# Altium PCB SPT3G_LCTestBoard.PcbDoc (part 1 of 3)
Units mil, origin at the board's own origin, x right, y up, seen from the top; angles counter-clockwise.
Board outline 4083.5 x 1969 mil, 6 copper layers (Top Layer, Signal Layer 1, Internal Plane 1, Internal Plane 2, Signal Layer 2, Bottom Layer), stack 61.6 mil thick; 146 components, 265 nets, 634 pads, 264 vias.
Unrouted connection lines stored in the file: 59.
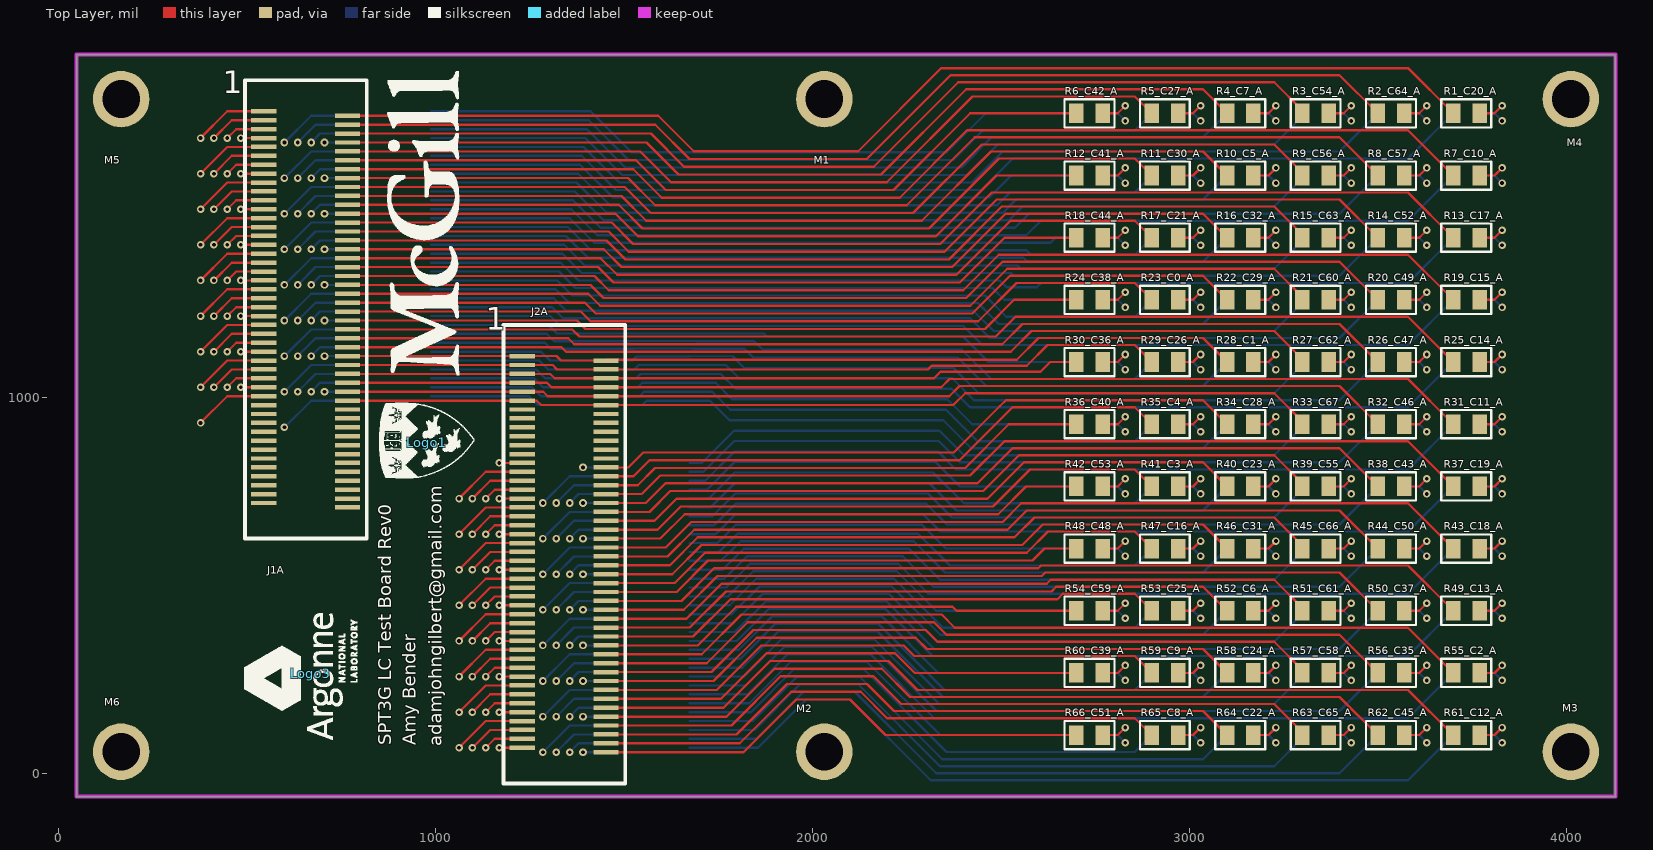
[diagram p0: Top Layer view]
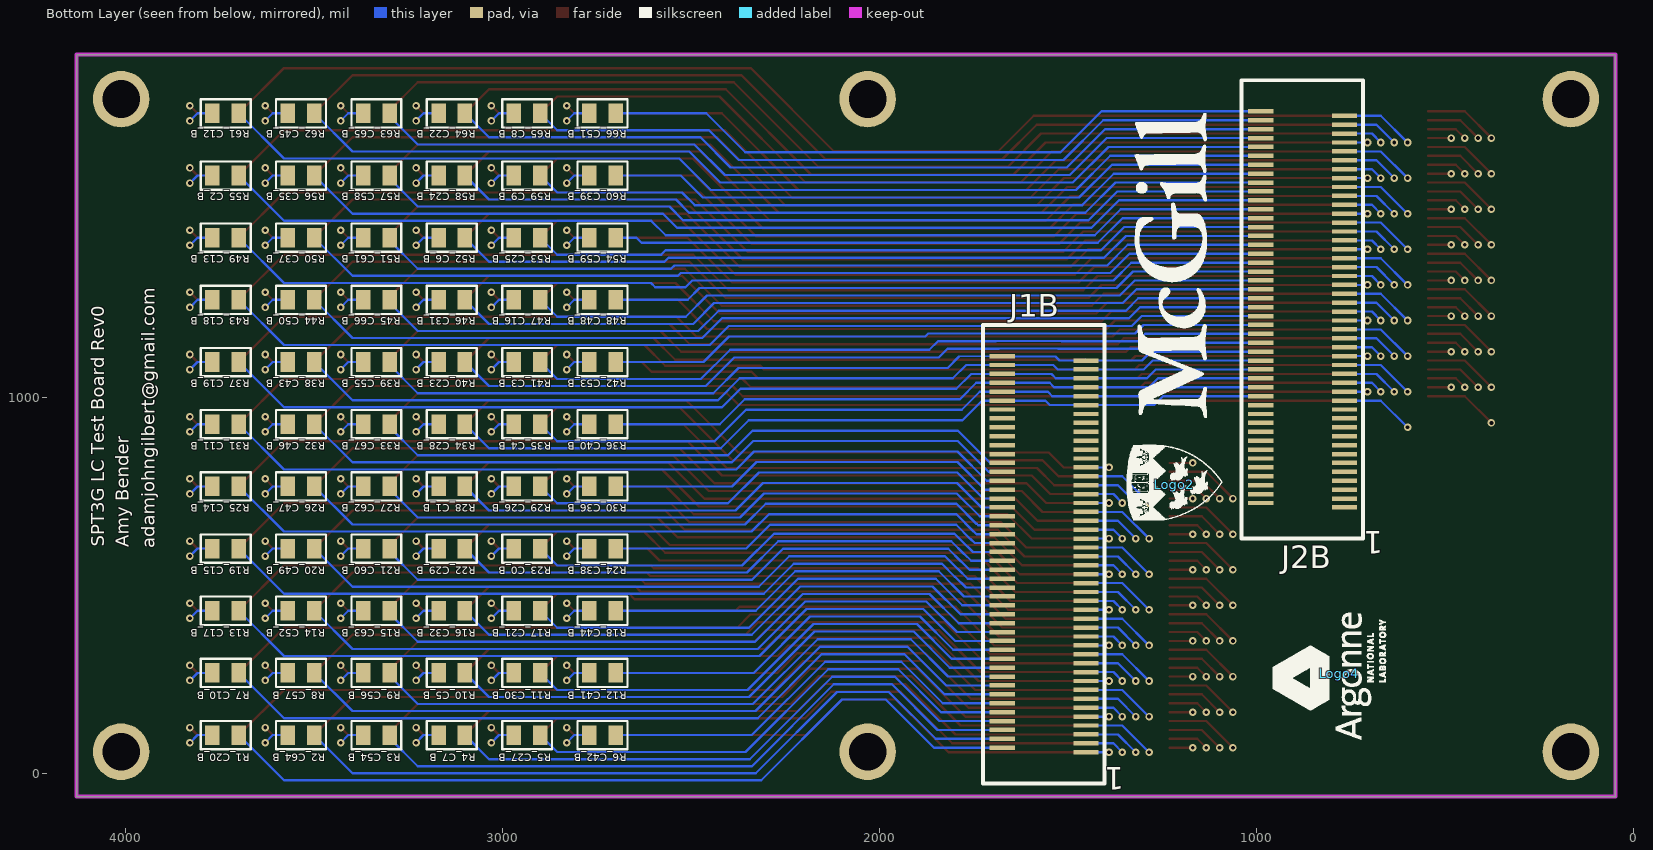
[diagram p1: Bottom Layer view, seen from below]
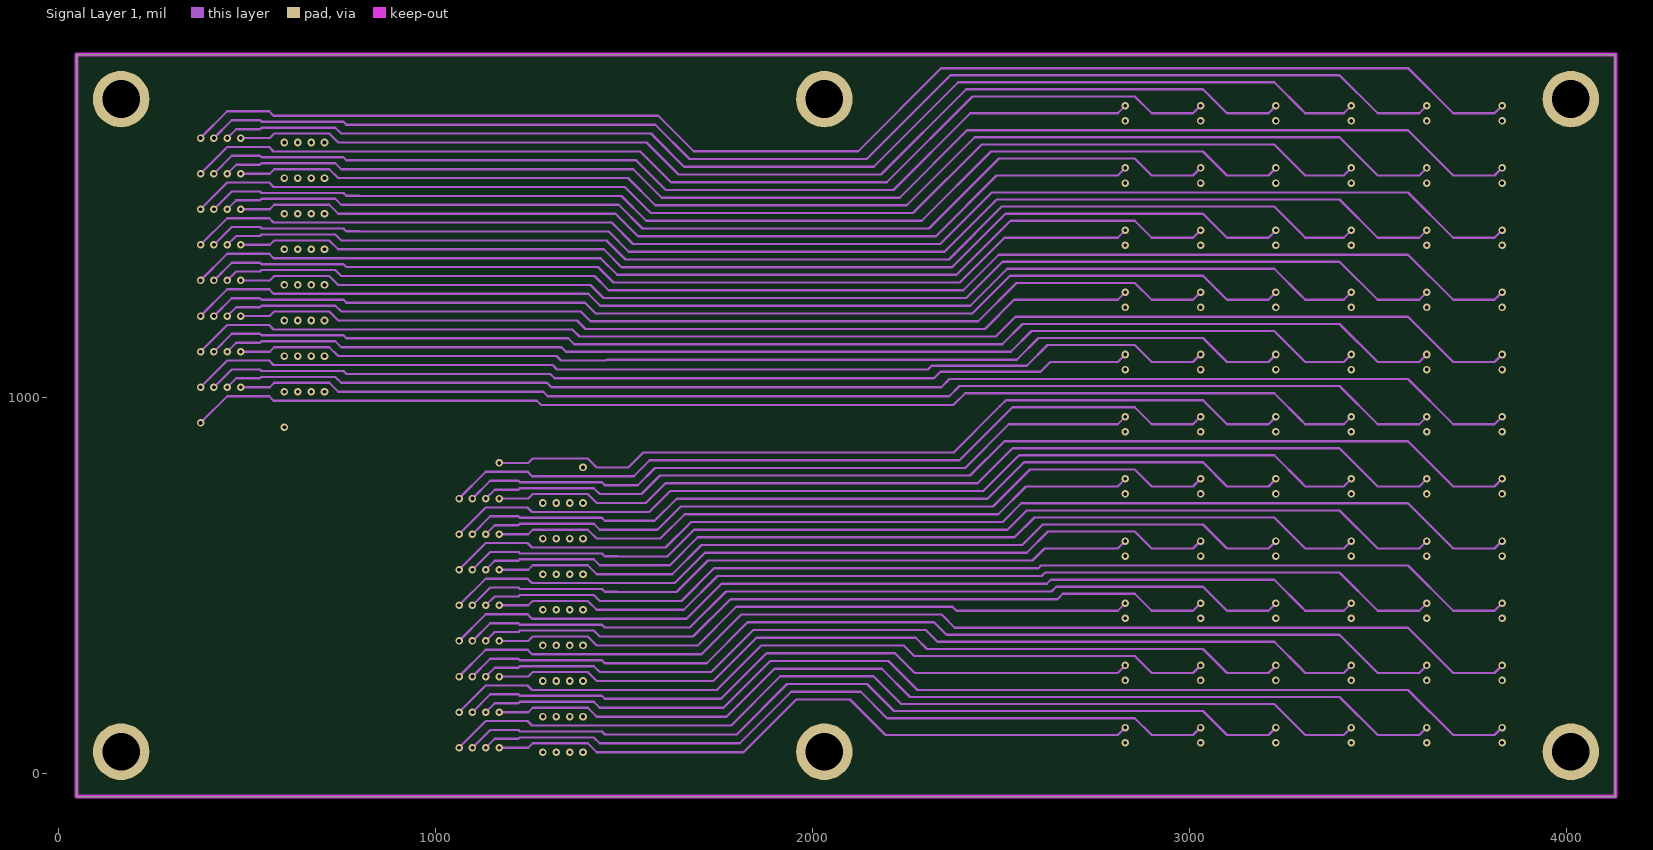
[diagram p2: Signal Layer 1]
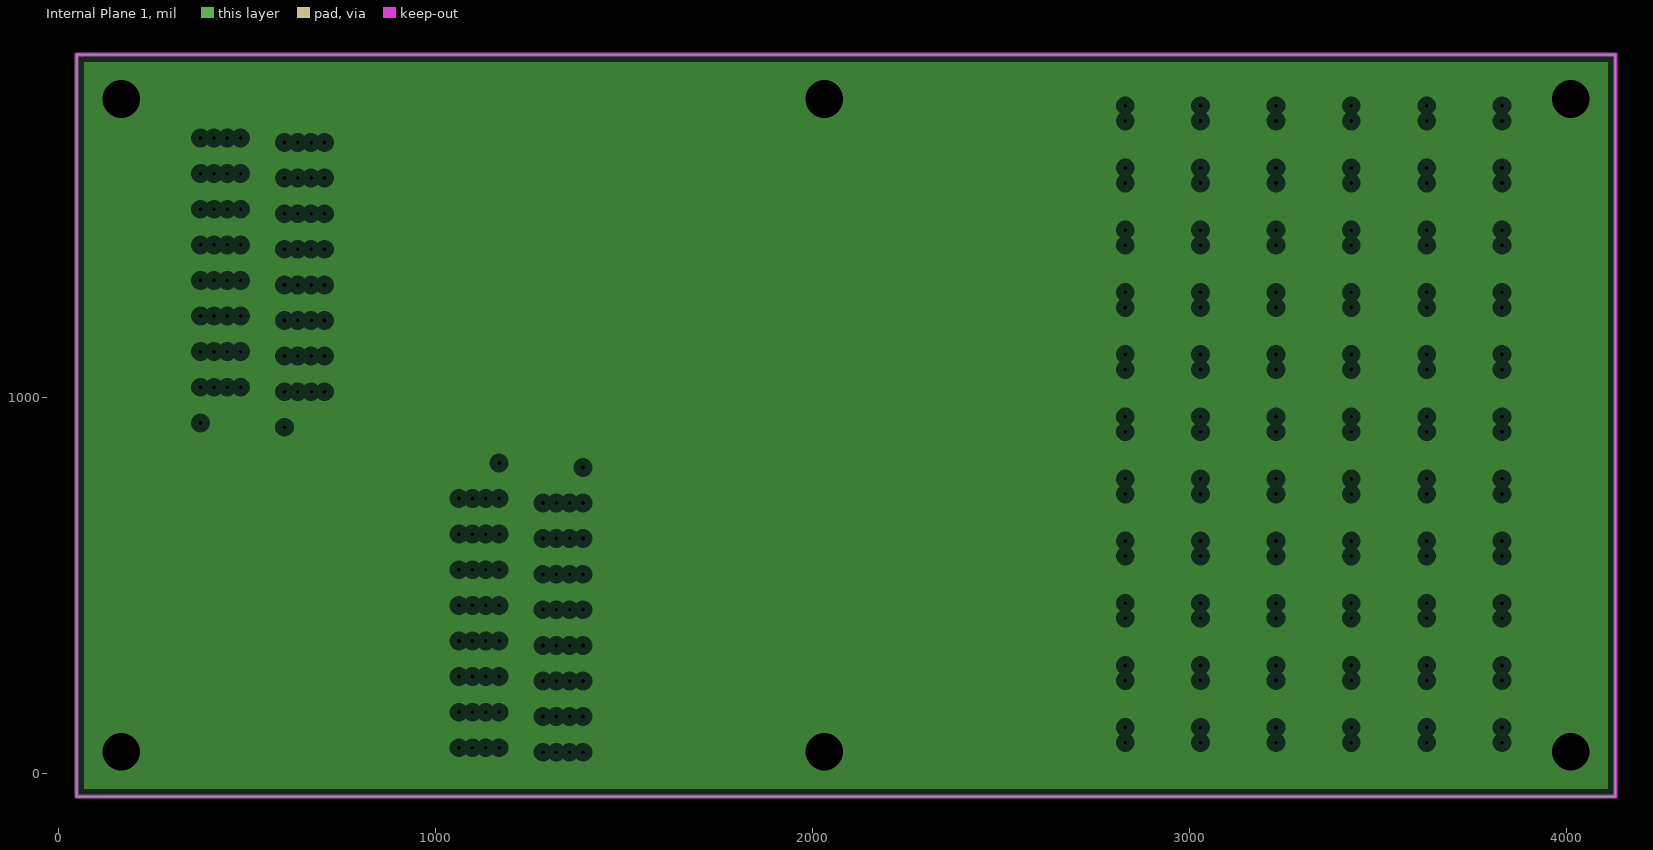
[diagram p3: Internal Plane 1, clearances drawn from the general rule]
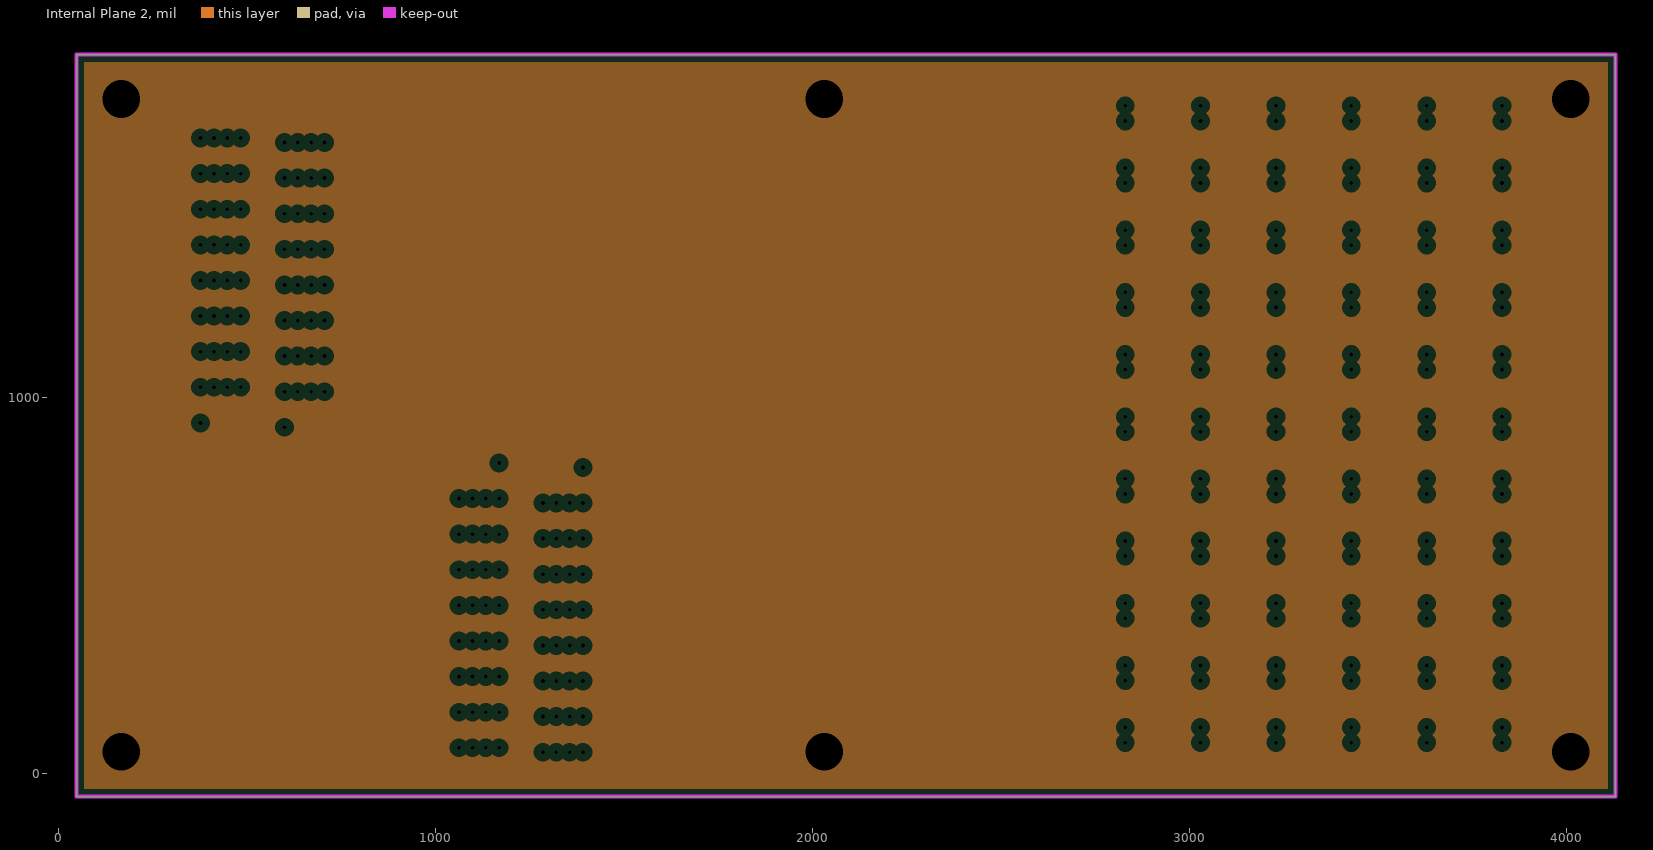
[diagram p4: Internal Plane 2, clearances drawn from the general rule]
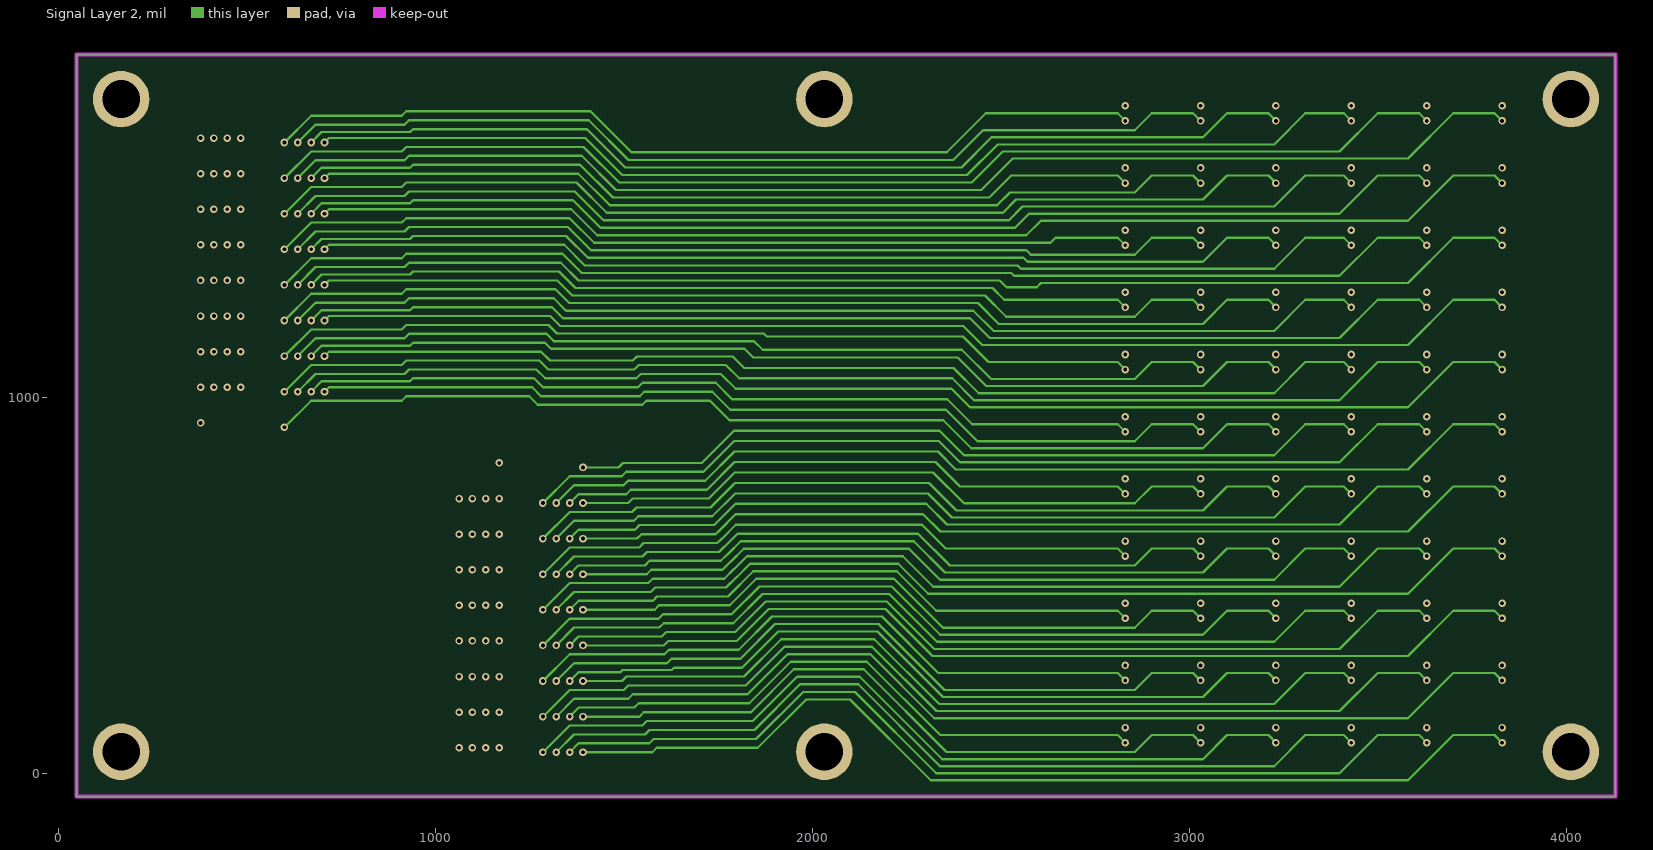
[diagram p5: Signal Layer 2]

## Layer stack, top to bottom
Top Solder: solder mask 0.4, Solder Resist, Dk 3.5
Top Layer: signal copper 1.4
Dielectric 1: core 4, FR-4, Dk 4.2
Signal Layer 1: signal copper 0.7
Dielectric 3: prepreg 9, Dk 4.2
Internal Plane 1: plane copper 0.7, net GND
Dielectric 4: core 30, Dk 4.2
Internal Plane 2: plane copper 0.7, net GND
Dielectric 5: prepreg 9, Dk 4.2
Signal Layer 2: signal copper 0.7
Dielectric 2: core 4, Dk 4.2
Bottom Layer: signal copper 1.4
Bottom Solder: solder mask 0.4, Solder Resist, Dk 3.5

## Board outline
47.08,-60.04 4130.58,-60.04 4130.58,1908.96 47.08,1908.96

## Design rules (kind name [scope] priority, off if disabled: settings)
Clearance [All] p1: gap=6
ComponentClearance [All] p1 off: gap=10 collisioncheckmode=3 verticalgap=10 showdistances=FALSE
HoleSize [All] p1: absolutevalues=TRUE maxlimit=200 minlimit=1 maxpercent=80.000 minpercent=20.000
MinimumSolderMaskSliver [All] p1: minsoldermaskwidth=3
PlaneClearance [All] p1: clearance=20
PlaneConnect MountingHoleRelief [(ObjectKind = 'Pad') And (Layer = 'MultiLayer') And (AsMils(HoleDiameter) = 120)] p1: planeconnectstyle=Direct reliefexpansion=20 reliefentries=4 reliefconductorwidth=30 reliefairgap=10
PlaneConnect [All] p2: planeconnectstyle=Relief reliefexpansion=20 reliefentries=4 reliefconductorwidth=10 reliefairgap=10
PolygonConnect [All] p1: connectstyle=Relief reliefconductorwidth=10 reliefentries=4 polygonreliefangle="90 Angle" airgapwidth=10
RoutingCorners [All] p1: cornerstyle=45-Degree minsetback=100 maxsetback=5000
RoutingLayers [All] p1: top layer_v5=TRUE mid layer 1_v5=TRUE mid layer 2_v5=FALSE bottom layer_v5=FALSE
RoutingPriority [All] p1: routingpriority=1
RoutingVias [All] p1: holewidth=10 width=20 viastyle="Through Hole" minholewidth=10 minwidth=20 maxholewidth=28 maxwidth=50
SilkToBoardRegionClearance [All] p1 off:
SilkToSilkClearance [All] p1: silktosilkclearance=0
SilkToSolderMaskClearance [IsPad] p1: minsilkscreentomaskgap=3 clearancetoexposedcopper=TRUE
SolderMaskExpansion [All] p1: expansion=4
Width [All] p1: maxlimit=100 minlimit=3 preferedwidth=6
19 further rules are at their usual default settings.

## Classes and differential pairs
channel class Resistors: A B
component class TopLevelSchem: Logo1 Logo2 M1 M2 M3 M4 M5 M6
component class S2: J1B J2B
component class S1: J1A J2A
component class B: R0_B R1_C20_B R2_C64_B R3_C54_B R4_C7_B R5_C27_B R6_C42_B R7_C10_B R8_C57_B R9_C56_B R10_C5_B R11_C30_B R12_C41_B R13_C17_B R14_C52_B R15_C63_B R16_C32_B R17_C21_B R18_C44_B R19_C15_B R20_C49_B R21_C60_B R22_C29_B R23_C0_B R24_C38_B R25_C14_B R26_C47_B R27_C62_B R28_C1_B R29_C26_B R30_C36_B R31_C11_B R32_C46_B R33_C67_B R35_C4_B R36_C40_B R37_C19_B R38_C43_B R39_C55_B R40_B R40_C23_B R41_C3_B R42_C53_B R43_C18_B R44_C50_B R45_C66_B R46_C31_B R47_C16_B R48_C48_B R49_C13_B R50_C37_B R51_C61_B R52_C6_B R53_C25_B R54_C59_B R55_C2_B R56_C35_B R57_C58_B R58_C24_B R59_C9_B R60_C39_B R61_C12_B R62_C45_B R63_C65_B R64_C22_B R65_C8_B R66_C51_B
component class A: R0_A R1_C20_A R2_C64_A R3_C54_A R4_C7_A R5_C27_A R6_C42_A R7_C10_A R8_C57_A R9_C56_A R10_C5_A R11_C30_A R12_C41_A R13_C17_A R14_C52_A R15_C63_A R16_C32_A R17_C21_A R18_C44_A R19_C15_A R20_C49_A R21_C60_A R22_C29_A R23_C0_A R24_C38_A R25_C14_A R26_C47_A R27_C62_A R28_C1_A R29_C26_A R30_C36_A R31_C11_A R32_C46_A R33_C67_A R35_C4_A R36_C40_A R37_C19_A R38_C43_A R39_C55_A R40_C23_A R41_C3_A R42_C53_A R43_C18_A R44_C50_A R45_C66_A R46_C31_A R47_C16_A R48_C48_A R49_C13_A R50_C37_A R51_C61_A R52_C6_A R53_C25_A R54_C59_A R55_C2_A R56_C35_A R57_C58_A R58_C24_A R59_C9_A R60_C39_A R61_C12_A R62_C45_A R63_C65_A R64_C22_A R65_C8_A R66_C51_A

## Components (designator, comment, footprint, x,y, rotation, side; value= is the part's Value field where it differs from the comment)
J1A "ZIF Connector" LCBOARD_ZIFCON#1 576.93,1758.47 r270 top
J1B "ZIF Connector" LCBOARD_ZIFCON#2 1485.35,57.68 r90 bottom
J2A "ZIF Connector" LCBOARD_ZIFCON#1 1262.91,1108.86 r270 top
J2B "ZIF Connector" LCBOARD_ZIFCON#2 799.37,707.28 r90 bottom
Logo1 "McGillLogo1" McGillLogo1 975.66,879.43 r90 top
Logo2 "McGillLogo1" McGillLogo1 1217.85,767.88 r90 bottom
Logo3 "ArgonneLogo" ArgonneLogo 668.28,265.72 r90 top
Logo4 "ArgonneLogo" ArgonneLogo 780.12,266.36 r90 bottom (schematic designator Logo3)
M1 "MountingHole" MOUNTINGHOLE#1 2031.36,1790.96 r0 top
M2 "MountingHole" MOUNTINGHOLE#1 2031.36,58.96 r0 top
M3 "MountingHole" MountingHole#1 4220.49,1786.87 r0 top
M4 "MountingHole" MountingHole#2 4012.49,1786.87 r0 top
M5 "MountingHole" MOUNTINGHOLE#2 194.75,1699.77 r0 top
M6 "MountingHole" MOUNTINGHOLE#3 200.56,127.26 r0 top
R1_C20_A "Res0805" 0805 3700,1753.12 r0 top (schematic designator R1_C20)
R1_C20_B "Res0805" 0805 3700,103.12 r0 bottom (schematic designator R1_C20)
R2_C64_A "Res0805" 0805 3500,1753.12 r0 top (schematic designator R2_C64)
R2_C64_B "Res0805" 0805 3500,103.12 r0 bottom (schematic designator R2_C64)
R3_C54_A "Res0805" 0805 3300,1753.12 r0 top (schematic designator R3_C54)
R3_C54_B "Res0805" 0805 3300,103.12 r0 bottom (schematic designator R3_C54)
R4_C7_A "Res0805" 0805 3100,1753.12 r0 top (schematic designator R4_C7)
R4_C7_B "Res0805" 0805 3100,103.12 r0 bottom (schematic designator R4_C7)
R5_C27_A "Res0805" 0805 2900,1753.12 r0 top (schematic designator R5_C27)
R5_C27_B "Res0805" 0805 2900,103.12 r0 bottom (schematic designator R5_C27)
R6_C42_A "Res0805" 0805 2700,1753.12 r0 top (schematic designator R6_C42)
R6_C42_B "Res0805" 0805 2700,103.12 r0 bottom (schematic designator R6_C42)
R7_C10_A "Res0805" 0805 3700,1588.12 r0 top (schematic designator R7_C10)
R7_C10_B "Res0805" 0805 3700,268.12 r0 bottom (schematic designator R7_C10)
R8_C57_A "Res0805" 0805 3500,1588.12 r0 top (schematic designator R8_C57)
R8_C57_B "Res0805" 0805 3500,268.12 r0 bottom (schematic designator R8_C57)
R9_C56_A "Res0805" 0805 3300,1588.12 r0 top (schematic designator R9_C56)
R9_C56_B "Res0805" 0805 3300,268.12 r0 bottom (schematic designator R9_C56)
R10_C5_A "Res0805" 0805 3100,1588.12 r0 top (schematic designator R10_C5)
R10_C5_B "Res0805" 0805 3100,268.12 r0 bottom (schematic designator R10_C5)
R11_C30_A "Res0805" 0805 2900,1588.12 r0 top (schematic designator R11_C30)
R11_C30_B "Res0805" 0805 2900,268.12 r0 bottom (schematic designator R11_C30)
R12_C41_A "Res0805" 0805 2700,1588.12 r0 top (schematic designator R12_C41)
R12_C41_B "Res0805" 0805 2700,268.12 r0 bottom (schematic designator R12_C41)
R13_C17_A "Res0805" 0805 3700,1423.12 r0 top (schematic designator R13_C17)
R13_C17_B "Res0805" 0805 3700,433.12 r0 bottom (schematic designator R13_C17)
R14_C52_A "Res0805" 0805 3500,1423.12 r0 top (schematic designator R14_C52)
R14_C52_B "Res0805" 0805 3500,433.12 r0 bottom (schematic designator R14_C52)
R15_C63_A "Res0805" 0805 3300,1423.12 r0 top (schematic designator R15_C63)
R15_C63_B "Res0805" 0805 3300,433.12 r0 bottom (schematic designator R15_C63)
R16_C32_A "Res0805" 0805 3100,1423.12 r0 top (schematic designator R16_C32)
R16_C32_B "Res0805" 0805 3100,433.12 r0 bottom (schematic designator R16_C32)
R17_C21_A "Res0805" 0805 2900,1423.12 r0 top (schematic designator R17_C21)
R17_C21_B "Res0805" 0805 2900,433.12 r0 bottom (schematic designator R17_C21)
R18_C44_A "Res0805" 0805 2700,1423.12 r0 top (schematic designator R18_C44)
R18_C44_B "Res0805" 0805 2700,433.12 r0 bottom (schematic designator R18_C44)
R19_C15_A "Res0805" 0805 3700,1258.12 r0 top (schematic designator R19_C15)
R19_C15_B "Res0805" 0805 3700,598.12 r0 bottom (schematic designator R19_C15)
R20_C49_A "Res0805" 0805 3500,1258.12 r0 top (schematic designator R20_C49)
R20_C49_B "Res0805" 0805 3500,598.12 r0 bottom (schematic designator R20_C49)
R21_C60_A "Res0805" 0805 3300,1258.12 r0 top (schematic designator R21_C60)
R21_C60_B "Res0805" 0805 3300,598.12 r0 bottom (schematic designator R21_C60)
R22_C29_A "Res0805" 0805 3100,1258.12 r0 top (schematic designator R22_C29)
R22_C29_B "Res0805" 0805 3100,598.12 r0 bottom (schematic designator R22_C29)
R23_C0_A "Res0805" 0805 2900,1258.12 r0 top (schematic designator R23_C0)
R23_C0_B "Res0805" 0805 2900,598.12 r0 bottom (schematic designator R23_C0)
R24_C38_A "Res0805" 0805 2700,1258.12 r0 top (schematic designator R24_C38)
R24_C38_B "Res0805" 0805 2700,598.12 r0 bottom (schematic designator R24_C38)
R25_C14_A "Res0805" 0805 3700,1093.12 r0 top (schematic designator R25_C14)
R25_C14_B "Res0805" 0805 3700,763.12 r0 bottom (schematic designator R25_C14)
R26_C47_A "Res0805" 0805 3500,1093.12 r0 top (schematic designator R26_C47)
R26_C47_B "Res0805" 0805 3500,763.12 r0 bottom (schematic designator R26_C47)
R27_C62_A "Res0805" 0805 3300,1093.12 r0 top (schematic designator R27_C62)
R27_C62_B "Res0805" 0805 3300,763.12 r0 bottom (schematic designator R27_C62)
R28_C1_A "Res0805" 0805 3100,1093.12 r0 top (schematic designator R28_C1)
R28_C1_B "Res0805" 0805 3100,763.12 r0 bottom (schematic designator R28_C1)
R29_C26_A "Res0805" 0805 2900,1093.12 r0 top (schematic designator R29_C26)
R29_C26_B "Res0805" 0805 2900,763.12 r0 bottom (schematic designator R29_C26)
R30_C36_A "Res0805" 0805 2700,1093.12 r0 top (schematic designator R30_C36)
R30_C36_B "Res0805" 0805 2700,763.12 r0 bottom (schematic designator R30_C36)
R31_C11_A "Res0805" 0805 3700,928.12 r0 top (schematic designator R31_C11)
R31_C11_B "Res0805" 0805 3700,928.12 r0 bottom (schematic designator R31_C11)
R32_C46_A "Res0805" 0805 3500,928.12 r0 top (schematic designator R32_C46)
R32_C46_B "Res0805" 0805 3500,928.12 r0 bottom (schematic designator R32_C46)
R33_C67_A "Res0805" 0805 3300,928.12 r0 top (schematic designator R33_C67)
R33_C67_B "Res0805" 0805 3300,928.12 r0 bottom (schematic designator R33_C67)
R34_C28_A "Res0805" 0805 3100,928.12 r0 top (schematic designator R34_C28)
R34_C28_B "Res0805" 0805 3100,928.12 r0 bottom (schematic designator R34_C28)
R35_C4_A "Res0805" 0805 2900,928.12 r0 top (schematic designator R35_C4)
R35_C4_B "Res0805" 0805 2900,928.12 r0 bottom (schematic designator R35_C4)
R36_C40_A "Res0805" 0805 2700,928.12 r0 top (schematic designator R36_C40)
R36_C40_B "Res0805" 0805 2700,928.12 r0 bottom (schematic designator R36_C40)
R37_C19_A "Res0805" 0805 3700,763.12 r0 top (schematic designator R37_C19)
R37_C19_B "Res0805" 0805 3700,1093.12 r0 bottom (schematic designator R37_C19)
R38_C43_A "Res0805" 0805 3500,763.12 r0 top (schematic designator R38_C43)
R38_C43_B "Res0805" 0805 3500,1093.12 r0 bottom (schematic designator R38_C43)
R39_C55_A "Res0805" 0805 3300,763.12 r0 top (schematic designator R39_C55)
R39_C55_B "Res0805" 0805 3300,1093.12 r0 bottom (schematic designator R39_C55)
R40_C23_A "Res0805" 0805 3100,763.12 r0 top (schematic designator R40_C23)
R40_C23_B "Res0805" 0805 3100,1093.12 r0 bottom (schematic designator R40_C23)
R41_C3_A "Res0805" 0805 2900,763.12 r0 top (schematic designator R41_C3)
R41_C3_B "Res0805" 0805 2900,1093.12 r0 bottom (schematic designator R41_C3)
R42_C53_A "Res0805" 0805 2700,763.12 r0 top (schematic designator R42_C53)
R42_C53_B "Res0805" 0805 2700,1093.12 r0 bottom (schematic designator R42_C53)
R43_C18_A "Res0805" 0805 3700,598.12 r0 top (schematic designator R43_C18)
R43_C18_B "Res0805" 0805 3700,1258.12 r0 bottom (schematic designator R43_C18)
R44_C50_A "Res0805" 0805 3500,598.12 r0 top (schematic designator R44_C50)
R44_C50_B "Res0805" 0805 3500,1258.12 r0 bottom (schematic designator R44_C50)
R45_C66_A "Res0805" 0805 3300,598.12 r0 top (schematic designator R45_C66)
R45_C66_B "Res0805" 0805 3300,1258.12 r0 bottom (schematic designator R45_C66)
R46_C31_A "Res0805" 0805 3100,598.12 r0 top (schematic designator R46_C31)
R46_C31_B "Res0805" 0805 3100,1258.12 r0 bottom (schematic designator R46_C31)
R47_C16_A "Res0805" 0805 2900,598.12 r0 top (schematic designator R47_C16)
R47_C16_B "Res0805" 0805 2900,1258.12 r0 bottom (schematic designator R47_C16)
R48_C48_A "Res0805" 0805 2700,598.12 r0 top (schematic designator R48_C48)
R48_C48_B "Res0805" 0805 2700,1258.12 r0 bottom (schematic designator R48_C48)
R49_C13_A "Res0805" 0805 3700,433.12 r0 top (schematic designator R49_C13)
R49_C13_B "Res0805" 0805 3700,1423.12 r0 bottom (schematic designator R49_C13)
R50_C37_A "Res0805" 0805 3500,433.12 r0 top (schematic designator R50_C37)
R50_C37_B "Res0805" 0805 3500,1423.12 r0 bottom (schematic designator R50_C37)
R51_C61_A "Res0805" 0805 3300,433.12 r0 top (schematic designator R51_C61)
R51_C61_B "Res0805" 0805 3300,1423.12 r0 bottom (schematic designator R51_C61)
R52_C6_A "Res0805" 0805 3100,433.12 r0 top (schematic designator R52_C6)
R52_C6_B "Res0805" 0805 3100,1423.12 r0 bottom (schematic designator R52_C6)
R53_C25_A "Res0805" 0805 2900,433.12 r0 top (schematic designator R53_C25)
R53_C25_B "Res0805" 0805 2900,1423.12 r0 bottom (schematic designator R53_C25)
R54_C59_A "Res0805" 0805 2700,433.12 r0 top (schematic designator R54_C59)
R54_C59_B "Res0805" 0805 2700,1423.12 r0 bottom (schematic designator R54_C59)
R55_C2_A "Res0805" 0805 3700,268.12 r0 top (schematic designator R55_C2)
R55_C2_B "Res0805" 0805 3700,1588.12 r0 bottom (schematic designator R55_C2)
R56_C35_A "Res0805" 0805 3500,268.12 r0 top (schematic designator R56_C35)
R56_C35_B "Res0805" 0805 3500,1588.12 r0 bottom (schematic designator R56_C35)
R57_C58_A "Res0805" 0805 3300,268.12 r0 top (schematic designator R57_C58)
R57_C58_B "Res0805" 0805 3300,1588.12 r0 bottom (schematic designator R57_C58)
R58_C24_A "Res0805" 0805 3100,268.12 r0 top (schematic designator R58_C24)
R58_C24_B "Res0805" 0805 3100,1588.12 r0 bottom (schematic designator R58_C24)
R59_C9_A "Res0805" 0805 2900,268.12 r0 top (schematic designator R59_C9)
R59_C9_B "Res0805" 0805 2900,1588.12 r0 bottom (schematic designator R59_C9)
R60_C39_A "Res0805" 0805 2700,268.12 r0 top (schematic designator R60_C39)
R60_C39_B "Res0805" 0805 2700,1588.12 r0 bottom (schematic designator R60_C39)
R61_C12_A "Res0805" 0805 3700,103.12 r0 top (schematic designator R61_C12)
R61_C12_B "Res0805" 0805 3700,1753.12 r0 bottom (schematic designator R61_C12)
R62_C45_A "Res0805" 0805 3500,103.12 r0 top (schematic designator R62_C45)
R62_C45_B "Res0805" 0805 3500,1753.12 r0 bottom (schematic designator R62_C45)
R63_C65_A "Res0805" 0805 3300,103.12 r0 top (schematic designator R63_C65)
R63_C65_B "Res0805" 0805 3300,1753.12 r0 bottom (schematic designator R63_C65)
R64_C22_A "Res0805" 0805 3100,103.12 r0 top (schematic designator R64_C22)
R64_C22_B "Res0805" 0805 3100,1753.12 r0 bottom (schematic designator R64_C22)
R65_C8_A "Res0805" 0805 2900,103.12 r0 top (schematic designator R65_C8)
R65_C8_B "Res0805" 0805 2900,1753.12 r0 bottom (schematic designator R65_C8)
R66_C51_A "Res0805" 0805 2700,103.12 r0 top (schematic designator R66_C51)
R66_C51_B "Res0805" 0805 2700,1753.12 r0 bottom (schematic designator R66_C51)

## Footprints (in the part's own frame and the unit in brackets; to place one, negate y for a bottom-side part, rotate by r counter-clockwise, add the part's x,y. Pads: shape width x height; smd on the part's side, far side on the other; paste and mask are expansions set on the pad)
0805 [mil]
  rect 38.5x52 smd: 1(0,0) 2(70,0)
  silkscreen extent -31,-37 101,38
ArgonneLogo [mil]
  silkscreen extent -175,-125 161,174
LCBOARD_ZIFCON#1 [mm]
  rect 0.3x1.7 smd: 1(0,-0.85) 2(0.3,4.8) 3(0.6,-0.85) 4(0.9,4.8) 5(1.2,-0.85) 6(1.5,4.8) 7(1.8,-0.85) 8(2.1,4.8) 9(2.4,-0.85) 10(2.7,4.8) 11(3,-0.85) 12(3.3,4.8) 13(3.6,-0.85) 14(3.9,4.8) 15(4.2,-0.85) 16(4.5,4.8) 17(4.8,-0.85) 18(5.1,4.8) 19(5.4,-0.85) 20(5.7,4.8) 21(6,-0.85) 22(6.3,4.8) 23(6.6,-0.85) 24(6.9,4.8) 25(7.2,-0.85) 26(7.5,4.8) 27(7.8,-0.85) 28(8.1,4.8) 29(8.4,-0.85) 30(8.7,4.8) 31(9,-0.85) 32(9.3,4.8) 33(9.6,-0.85) 34(9.9,4.8) 35(10.2,-0.85) 36(10.5,4.8) 37(10.8,-0.85) 38(11.1,4.8) 39(11.4,-0.85) 40(11.7,4.8) 41(12,-0.85) 42(12.3,4.8) 43(12.6,-0.85) 44(12.9,4.8) 45(13.2,-0.85) 46(13.5,4.8) 47(13.8,-0.85) 48(14.1,4.8) 49(14.4,-0.85) 50(14.7,4.8) 51(15,-0.85) 52(15.3,4.8) 53(15.6,-0.85) 54(15.9,4.8) 55(16.2,-0.85) 56(16.5,4.8) 57(16.8,-0.85) 58(17.1,4.8) 59(17.4,-0.85) 60(17.7,4.8) 61(18,-0.85) 62(18.3,4.8) 63(18.6,-0.85) 64(18.9,4.8) 65(19.2,-0.85) 66(19.5,4.8) 67(19.8,-0.85) 68(20.1,4.8) 69(20.4,-0.85) 70(20.7,4.8) 71(21,-0.85) 72(21.3,4.8) 73(21.6,-0.85) 74(21.9,4.8) 75(22.2,-0.85) 76(22.5,4.8) 77(22.8,-0.85) 78(23.1,4.8) 79(23.4,-0.85) 80(23.7,4.8) 81(24,-0.85) 82(24.3,4.8) 83(24.6,-0.85) 84(24.9,4.8) 85(25.2,-0.85) 86(25.5,4.8) 87(25.8,-0.85) 88(26.1,4.8) 89(26.4,-0.85) 90(26.7,4.8)
  round 0.5 on Top Overlay: 2(-2.3,-2.4)
  silkscreen extent -2.1,-2.1 28.8,6.1, body extent -2.1,-1.73 28.8,5.68, height 6.5
LCBOARD_ZIFCON#2 [mm]
  rect 0.3x1.7 smd: 1(0,-0.85) 2(0.3,4.8) 3(0.6,-0.85) 4(0.9,4.8) 5(1.2,-0.85) 6(1.5,4.8) 7(1.8,-0.85) 8(2.1,4.8) 9(2.4,-0.85) 10(2.7,4.8) 11(3,-0.85) 12(3.3,4.8) 13(3.6,-0.85) 14(3.9,4.8) 15(4.2,-0.85) 16(4.5,4.8) 17(4.8,-0.85) 18(5.1,4.8) 19(5.4,-0.85) 20(5.7,4.8) 21(6,-0.85) 22(6.3,4.8) 23(6.6,-0.85) 24(6.9,4.8) 25(7.2,-0.85) 26(7.5,4.8) 27(7.8,-0.85) 28(8.1,4.8) 29(8.4,-0.85) 30(8.7,4.8) 31(9,-0.85) 32(9.3,4.8) 33(9.6,-0.85) 34(9.9,4.8) 35(10.2,-0.85) 36(10.5,4.8) 37(10.8,-0.85) 38(11.1,4.8) 39(11.4,-0.85) 40(11.7,4.8) 41(12,-0.85) 42(12.3,4.8) 43(12.6,-0.85) 44(12.9,4.8) 45(13.2,-0.85) 46(13.5,4.8) 47(13.8,-0.85) 48(14.1,4.8) 49(14.4,-0.85) 50(14.7,4.8) 51(15,-0.85) 52(15.3,4.8) 53(15.6,-0.85) 54(15.9,4.8) 55(16.2,-0.85) 56(16.5,4.8) 57(16.8,-0.85) 58(17.1,4.8) 59(17.4,-0.85) 60(17.7,4.8) 61(18,-0.85) 62(18.3,4.8) 63(18.6,-0.85) 64(18.9,4.8) 65(19.2,-0.85) 66(19.5,4.8) 67(19.8,-0.85) 68(20.1,4.8) 69(20.4,-0.85) 70(20.7,4.8) 71(21,-0.85) 72(21.3,4.8) 73(21.6,-0.85) 74(21.9,4.8) 75(22.2,-0.85) 76(22.5,4.8) 77(22.8,-0.85) 78(23.1,4.8) 79(23.4,-0.85) 80(23.7,4.8) 81(24,-0.85) 82(24.3,4.8) 83(24.6,-0.85) 84(24.9,4.8) 85(25.2,-0.85) 86(25.5,4.8) 87(25.8,-0.85) 88(26.1,4.8) 89(26.4,-0.85) 90(26.7,4.8)
  round 0.5 on Bottom Overlay: 2(-2.3,-2.4)
  silkscreen extent -2.1,-2.1 28.8,6.1, body extent -2.1,-1.73 28.8,5.68, height 6.5
McGillLogo1 [mil] "McGillLogo"
  silkscreen extent -95,-127 986,124
MOUNTINGHOLE#1 [mil] "Mounting Hole"
  round 150 hole 100: 0(0,0)
MOUNTINGHOLE#2 [mil] "Mounting Hole"
  round 150 hole 100: 0(-29.55,91.18)
MOUNTINGHOLE#3 [mil] "Mounting Hole"
  round 150 hole 100: 0(-35.37,-68.28)
MountingHole#1 [mil] "Mounting Hole"
  round 150 hole 100: 0(-208,-1727.91)
MountingHole#2 [mil] "Mounting Hole"
  round 150 hole 100: 0(0,4.09)

## Part data
J1A J1B J2A J2B: library part LCboard_FH16-90S-0.3SHW(05)
Logo1 Logo2 Logo3 Logo4: library part Logo
R1_C20_A R1_C20_B R2_C64_A R2_C64_B R3_C54_A R3_C54_B R4_C7_A R4_C7_B R5_C27_A R5_C27_B R6_C42_A R6_C42_B R7_C10_A R7_C10_B R8_C57_A R8_C57_B R9_C56_A R9_C56_B R10_C5_A R10_C5_B R11_C30_A R11_C30_B R12_C41_A R12_C41_B R13_C17_A R13_C17_B R14_C52_A R14_C52_B R15_C63_A R15_C63_B R16_C32_A R16_C32_B R17_C21_A R17_C21_B R18_C44_A R18_C44_B R19_C15_A R19_C15_B R20_C49_A R20_C49_B R21_C60_A R21_C60_B R22_C29_A R22_C29_B R23_C0_A R23_C0_B R24_C38_A R24_C38_B R25_C14_A R25_C14_B R26_C47_A R26_C47_B R27_C62_A R27_C62_B R28_C1_A R28_C1_B R29_C26_A R29_C26_B R30_C36_A R30_C36_B R31_C11_A R31_C11_B R32_C46_A R32_C46_B R33_C67_A R33_C67_B R34_C28_A R34_C28_B R35_C4_A R35_C4_B R36_C40_A R36_C40_B R37_C19_A R37_C19_B R38_C43_A R38_C43_B R39_C55_A R39_C55_B R40_C23_A R40_C23_B R41_C3_A R41_C3_B R42_C53_A R42_C53_B R43_C18_A R43_C18_B R44_C50_A R44_C50_B R45_C66_A R45_C66_B R46_C31_A R46_C31_B R47_C16_A R47_C16_B R48_C48_A R48_C48_B R49_C13_A R49_C13_B R50_C37_A R50_C37_B R51_C61_A R51_C61_B R52_C6_A R52_C6_B R53_C25_A R53_C25_B R54_C59_A R54_C59_B R55_C2_A R55_C2_B R56_C35_A R56_C35_B R57_C58_A R57_C58_B R58_C24_A R58_C24_B R59_C9_A R59_C9_B R60_C39_A R60_C39_B R61_C12_A R61_C12_B R62_C45_A R62_C45_B R63_C65_A R63_C65_B R64_C22_A R64_C22_B R65_C8_A R65_C8_B R66_C51_A R66_C51_B: "Resistor"

## Via types
v1: diameter 20, hole 10, Top Layer to Bottom Layer, 264 vias

## Nets (pads, with @x,y where several pads share a name; then routed paths per layer and width w, separated by ;. In a path a pad name is that pad's centre, name@x,y a point inside that pad or via, vN(x,y) a via of type N, cw(c..) or ccw(c..) an arc to the next point about the centre after c; other vN are vias at no path point)
FREQA0: J1A.46 R23_C0_A.1 | length 2205.3
  Top Layer w6: J1A.46@765.9,1226.97 1385.14,1226.97 1410.53,1201.58 2439.65,1201.58 2541.2,1303.13 2855,1303.13 R23_C0_A.1@2900,1258.13
FREQA1: J1A.56 J2A.1 J2A.2@1451.89,1097.05 R28_C1_A.1 | length 2390.2
  Top Layer w6: J1A.56@765.9,1108.86 J2A.1@1229.45,1108.86 1320.79,1108.86 1332.6,1097.05 J2A.2@1451.89,1097.05 1453.97,1099.13 1797.52,1099.13 2286.86,1099.13 2541.94,1099.13 2599.69,1156.88 3036.25,1156.88 R28_C1_A.1@3100,1093.13
FREQA2: J2A.68 R55_C2_A.1 | length 2355.9
  Top Layer w6: J2A.68@1451.89,317.52 1705.87,317.52 1811.3,422.95 2342.86,422.95 2377.69,388.13 3580,388.13 R55_C2_A.1@3700,268.13
FREQA3: J2A.40 R41_C3_A.1 | length 1533
  Top Layer w6: J2A.40@1451.89,648.23 1588.87,648.23 1650.45,709.81 2478.99,709.81 2577.3,808.13 2855,808.13 R41_C3_A.1@2900,763.13
FREQA4: J2A.28 R35_C4_A.1 | length 1542.6
  Top Layer w6: J2A.28@1451.89,789.96 1524.83,789.96 1567.62,832.76 1763.65,832.76 2390.23,832.76 2510.31,952.84 2530.6,973.13 2855,973.13 R35_C4_A.1@2900,928.13
FREQA5: J1A.20 R10_C5_A.1 | length 2464.1
  Top Layer w6: J1A.20@765.9,1534.06 1492.84,1534.06 1558.95,1467.95 2289.85,1467.95 2473.78,1651.88 3036.25,1651.88 R10_C5_A.1@3100,1588.13
FREQA6: J2A.62 R52_C6_A.1 | length 1719.5
  Top Layer w6: J2A.62@1451.89,388.39 1674.25,388.39 1770.29,484.42 2600.23,484.42 2634.24,484.42 2646.69,496.88 3036.25,496.88 R52_C6_A.1@3100,433.13
FREQA7: J1A.8 R4_C7_A.1 | length 2489.3
  Top Layer w6: J1A.8@765.9,1675.79 1559.26,1675.79 1644.16,1590.89 2181.85,1590.89 2407.84,1816.88 3036.25,1816.88 R4_C7_A.1@3100,1753.13
FREQA8: J2A.88 R65_C8_A.1 | length 1552.4
  Top Layer w6: J2A.88@1451.89,81.3 1806.83,81.3 1943.58,218.05 2127.8,218.05 2197.73,148.13 2855,148.13 R65_C8_A.1@2900,103.13
FREQA9: J2A.76 R59_C9_A.1 | length 1527.2
  Top Layer w6: J2A.76@1451.89,223.03 1746.06,223.03 1864.02,340.99 2242.35,340.99 2270.22,313.13 2575.78,313.13 2855,313.13 R59_C9_A.1@2900,268.13
FREQA10: J1A.14 R7_C10_A.1 | length 3089.1
  Top Layer w6: J1A.14@765.9,1604.92 1524.07,1604.92 1599.57,1529.42 2231.32,1529.42 2410.03,1708.13 3580,1708.13 R7_C10_A.1@3700,1588.13
FREQA11: J1A.62 J2A.7 J2A.8 R31_C11_A.1 | length 2997.8
  Top Layer w6: J1A.62@765.9,1037.99 J2A.7@1229.45,1037.99 1295.44,1037.99 1307.25,1026.18 J2A.8@1451.89,1026.18 1734.14,1026.18 2341.76,1026.18 2363.7,1048.13 3580,1048.13 R31_C11_A.1@3700,928.13
FREQA12: J2A.80 R61_C12_A.1 | length 2381.1
  Top Layer w6: J2A.80@1451.89,175.79 1763.76,175.79 1887.98,300.01 2201.54,300.01 2278.42,223.13 3580,223.13 R61_C12_A.1@3700,103.13
FREQA13: J2A.56 R49_C13_A.1 | length 2336.7
  Top Layer w6: J2A.56@1451.89,459.25 1652.12,459.25 1738.76,545.89 2598.77,545.89 2606,553.13 3580,553.13 R49_C13_A.1@3700,433.13
FREQA14: J1A.50 R25_C14_A.1 | length 3013.2
  Top Layer w6: J1A.50@765.9,1179.73 1362.61,1179.73 1381.45,1160.88 2486.5,1160.88 2538.74,1213.13 3580,1213.13 R25_C14_A.1@3700,1093.13
FREQA15: J1A.38 R19_C15_A.1 | length 3038.7
  Top Layer w6: J1A.38@765.9,1321.46 1421.27,1321.46 1459.19,1283.54 2399.69,1283.54 2494.27,1378.13 3580,1378.13 R19_C15_A.1@3700,1258.13
FREQA16: J2A.52 R47_C16_A.1 | length 1523.3
  Top Layer w6: J2A.52@1451.89,506.5 1634.37,506.5 1714.74,586.87 2568.37,586.87 2624.62,643.13 2855,643.13 R47_C16_A.1@2900,598.13
FREQA17: J1A.26 R13_C17_A.1 | length 3063.9
  Top Layer w6: J1A.26@765.9,1463.19 1466.92,1463.19 1523.63,1406.48 2338.88,1406.48 2475.52,1543.13 3580,1543.13 R13_C17_A.1@3700,1423.13
FREQA18: J2A.44 R43_C18_A.1 | length 2346.3
  Top Layer w6: J2A.44@1451.89,600.99 1610.33,600.99 1678.18,668.83 2504.71,668.83 2554,718.13 3580,718.13 R43_C18_A.1@3700,598.13
FREQA19: J2A.32 R37_C19_A.1 | length 2356
  Top Layer w6: J2A.32@1451.89,742.72 1546.72,742.72 1595.78,791.77 1803.62,791.77 2417.79,791.77 2509.14,883.13 3580,883.13 R37_C19_A.1@3700,763.13
FREQA20: J1A.2@765.9,1746.65 R1_C20_A.1 | length 3114.3
  Top Layer w6: J1A.2@765.9,1746.65 1590.54,1746.65 1684.84,1652.36 2121.13,1652.36 2341.89,1873.13 3580,1873.13 R1_C20_A.1@3700,1753.13
FREQA21: J1A.34 R17_C21_A.1 | length 2230.5
  Top Layer w6: J1A.34@765.9,1368.7 1437.66,1368.7 1481.84,1324.52 2381.91,1324.52 2525.51,1468.13 2855,1468.13 R17_C21_A.1@2900,1423.13
FREQA22: J2A.86 R64_C22_A.1 | length 1759.6
  Top Layer w6: J2A.86@1451.89,104.92 1798.52,104.92 1932.14,238.54 2144.81,238.54 2216.48,166.88 3036.25,166.88 R64_C22_A.1@3100,103.13
FREQA23: J2A.38 R40_C23_A.1 | length 1738.7
  Top Layer w6: J2A.38@1451.89,671.85 1580.74,671.85 1639.2,730.3 1865.41,730.3 2464.46,730.3 2561.03,826.88 3036.25,826.88 R40_C23_A.1@3100,763.13
FREQA24: J2A.74 R58_C24_A.1 | length 1734.3
  Top Layer w6: J2A.74@1451.89,246.66 1737,246.66 1851.83,361.48 2274.17,361.48 2303.78,331.88 3036.25,331.88 R58_C24_A.1@3100,268.13
FREQA25: J2A.64 R53_C25_A.1 | length 1513.7
  Top Layer w6: J2A.64@1451.89,364.77 1683.11,364.77 1782.28,463.93 2650.04,463.93 2664.23,478.13 2855,478.13 R53_C25_A.1@2900,433.13
FREQA26: J1A.58 J2A.3 J2A.4 R29_C26_A.1 | length 2184.4
  Top Layer w6: J1A.58@765.9,1085.24 J2A.3@1229.45,1085.24 1310.41,1085.24 1322.22,1073.43 J2A.4@1451.89,1073.43 1772.58,1073.43 2306.22,1073.43 2315.92,1083.13 2568.31,1083.13 2623.31,1138.13 2855,1138.13 R29_C26_A.1@2900,1093.13
FREQA27: J1A.10 R5_C27_A.1 | length 2280.9
  Top Layer w6: J1A.10@765.9,1652.17 1542.69,1652.17 1624.46,1570.4 2196.96,1570.4 2424.69,1798.13 2855,1798.13 R5_C27_A.1@2900,1753.13
FREQA28: J2A.26 R34_C28_A.1 | length 1748.4
  Top Layer w6: J2A.26@1451.89,813.58 1511.11,813.58 1550.77,853.25 1745.01,853.25 2374.81,853.25 2497.1,975.54 2513.44,991.88 3036.25,991.88 R34_C28_A.1@3100,928.13
FREQA29: J1A.44 R22_C29_A.1 | length 2413.7
  Top Layer w6: J1A.44@765.9,1250.59 1396.12,1250.59 1424.65,1222.07 2424.15,1222.07 2523.96,1321.88 3036.25,1321.88 R22_C29_A.1@3100,1258.13
FREQA30: J1A.22 R11_C30_A.1 | length 2255.7
  Top Layer w6: J1A.22@765.9,1510.43 1485.99,1510.43 1548.96,1447.46 2309.38,1447.46 2495.05,1633.13 2855,1633.13 R11_C30_A.1@2900,1588.13
FREQA31: J2A.50 R46_C31_A.1 | length 1729.1
  Top Layer w6: J2A.50@1451.89,530.12 1627.99,530.12 1705.23,607.36 2556.49,607.36 2611,661.88 3036.25,661.88 R46_C31_A.1@3100,598.13
FREQA32: J1A.32 R16_C32_A.1 | length 2438.8
  Top Layer w6: J1A.32@765.9,1392.32 1445.8,1392.32 1493.05,1345.08 2370.47,1345.08 2512.26,1486.88 3036.25,1486.88 R16_C32_A.1@3100,1423.13
FREQA35: J2A.70 R56_C35_A.1 | length 2148.7
  Top Layer w6: J2A.70@1451.89,293.9 1719.25,293.9 1827.81,402.46 2322.59,402.46 2355.68,369.38 3398.75,369.38 R56_C35_A.1@3500,268.13
FREQA36: J1A.60 J2A.5 J2A.6 R30_C36_A.1 | length 1957
  Top Layer w6: J1A.60@765.9,1061.62 J2A.5@1229.45,1061.62 1304.19,1061.62 1316,1049.8 J2A.6@1451.89,1049.8 1756.41,1049.8 2322.11,1049.8 2339.44,1067.13 2605.02,1067.13 2630.86,1092.96 2700,1092.96 R30_C36_A.1@2700,1093.13
FREQA37: J2A.58 R50_C37_A.1 | length 2131
  Top Layer w6: J2A.58@1451.89,435.63 1657.98,435.63 1747.75,525.4 2569.09,525.4 2608.54,525.4 2617.51,534.38 3398.75,534.38 R50_C37_A.1@3500,433.13
FREQA38: J1A.48 R24_C38_A.1 | length 1975.2
  Top Layer w6: J1A.48@765.9,1203.35 1375.16,1203.35 1397.42,1181.09 2457.7,1181.09 2534.74,1258.13 R24_C38_A.1@2700,1258.13
FREQA39: J2A.78 R60_C39_A.1 | length 1320
  Top Layer w6: J2A.78@1451.89,199.41 1757.04,199.41 1878.13,320.5 2219.09,320.5 2271.47,268.13 R60_C39_A.1@2700,268.13
FREQA40: J2A.30 R36_C40_A.1 | length 1315.1
  Top Layer w6: J2A.30@1451.89,766.34 1535.96,766.34 1581.88,812.26 1785.74,812.26 2405.1,812.26 2520.96,928.13 R36_C40_A.1@2700,928.13
FREQA41: J1A.24 R12_C41_A.1 | length 2025.6
  Top Layer w6: J1A.24@765.9,1486.81 1477.08,1486.81 1536.93,1426.97 2327.37,1426.97 2488.52,1588.13 R12_C41_A.1@2700,1588.13
FREQA42: J1A.12 R6_C42_A.1 | length 2050.8
  Top Layer w6: J1A.12@765.9,1628.54 1531.71,1628.54 1610.34,1549.91 2215.13,1549.91 2418.35,1753.13 R6_C42_A.1@2700,1753.13
FREQA43: J2A.34 R38_C43_A.1 | length 2150.2
  Top Layer w6: J2A.34@1451.89,719.1 1557.49,719.1 1609.68,771.28 1817.37,771.28 2437.85,771.28 2530.94,864.38 3398.75,864.38 R38_C43_A.1@3500,763.13
FREQA44: J1A.36 R18_C44_A.1 | length 2000.4
  Top Layer w6: J1A.36@765.9,1345.08 1430.58,1345.08 1471.63,1304.03 2390.68,1304.03 2509.77,1423.13 R18_C44_A.1@2700,1423.13
FREQA45: J2A.82 R62_C45_A.1 | length 2173.9
  Top Layer w6: J2A.82@1451.89,152.17 1771.83,152.17 1899.18,279.52 2183.61,279.52 2258.76,204.38 3398.75,204.38 R62_C45_A.1@3500,103.13
FREQA46: J1A.64 J2A.9 J2A.10 R32_C46_A.1 | length 2792
  Top Layer w6: J1A.64@765.9,1014.37 J2A.9@1229.45,1014.37 1285.32,1014.37 1297.13,1002.56 1452.53,1002.56 1711.34,1002.56 2363.01,1002.56 2389.83,1029.38 3398.75,1029.38 R32_C46_A.1@3500,928.13
FREQA47: J1A.52 R26_C47_A.1 | length 2805.2
  Top Layer w6: J1A.52@765.9,1156.1 1351.62,1156.1 1367.64,1140.09 1859.11,1140.09 2219.31,1140.09 2503.21,1140.09 2557.49,1194.38 3398.75,1194.38 R26_C47_A.1@3500,1093.13
FREQA48: J2A.54 R48_C48_A.1 | length 1295.9
  Top Layer w6: J2A.54@1451.89,482.88 1639.36,482.88 1722.87,566.38 1980,566.38 2583.99,566.38 2615.73,598.13 R48_C48_A.1@2700,598.13
FREQA49: J1A.40 R20_C49_A.1 | length 2830.3
  Top Layer w6: J1A.40@765.9,1297.84 1410.6,1297.84 1445.39,1263.05 2407.88,1263.05 2504.2,1359.38 3398.75,1359.38 R20_C49_A.1@3500,1258.13
FREQA50: J2A.46 R44_C50_A.1 | length 2140.6
  Top Layer w6: J2A.46@1451.89,577.36 1615.23,577.36 1686.21,648.34 2517.73,648.34 2568.76,699.38 3398.75,699.38 R44_C50_A.1@3500,598.13
FREQA51: J2A.90 R66_C51_A.1 | length 1345.2
  Top Layer w6: J2A.90@1451.89,57.68 1816.75,57.68 1956.64,197.56 2099.28,197.56 2193.72,103.13 R66_C51_A.1@2700,103.13
FREQA52: J1A.28 R14_C52_A.1 | length 2855.6
  Top Layer w6: J1A.28@765.9,1439.57 1458.94,1439.57 1512.52,1385.99 2350.39,1385.99 2488.77,1524.38 3398.75,1524.38 R14_C52_A.1@3500,1423.13
FREQA53: J2A.42 R42_C53_A.1 | length 1305.5
  Top Layer w6: J2A.42@1451.89,624.61 1596.21,624.61 1660.92,689.32 2492.91,689.32 2566.71,763.13 R42_C53_A.1@2700,763.13
FREQA54: J1A.6 R3_C54_A.1 | length 2702
  Top Layer w6: J1A.6@765.9,1699.41 1571.17,1699.41 1659.2,1611.38 2162.33,1611.38 2386.57,1835.63 3225,1835.63 3300,1760.63 R3_C54_A.1@3300,1753.13
FREQA55: J2A.36 R39_C55_A.1 | length 1948.9
  Top Layer w6: J2A.36@1451.89,695.47 1567.14,695.47 1622.46,750.79 1843.49,750.79 2453.03,750.79 2547.87,845.63 3225,845.63 3300,770.63 R39_C55_A.1@3300,763.13
FREQA56: J1A.18 R9_C56_A.1 | length 2676.8
  Top Layer w6: J1A.18@765.9,1557.68 1501.77,1557.68 1571.01,1488.44 2266.89,1488.44 2449.07,1670.63 3225,1670.63 3300,1595.63 R9_C56_A.1@3300,1588.13
FREQA57: J1A.16 R8_C57_A.1 | length 2880.8
  Top Layer w6: J1A.16@765.9,1581.3 1510.29,1581.3 1582.67,1508.93 2250.01,1508.93 2430.46,1689.38 3398.75,1689.38 R8_C57_A.1@3500,1588.13
FREQA58: J2A.72 R57_C58_A.1 | length 1945.9
  Top Layer w6: J2A.72@1451.89,270.28 1731.62,270.28 1843.32,381.97 2300.28,381.97 2331.63,350.63 3225,350.63 3300,275.63 R57_C58_A.1@3300,268.13
FREQA59: J2A.66 R54_C59_A.1 | length 1295
  Top Layer w6: J2A.66@1451.89,341.14 1695.49,341.14 1797.79,443.44 2371.42,443.44 2381.91,432.96 2700,432.96 R54_C59_A.1@2700,433.13
FREQA60: J1A.42 R21_C60_A.1 | length 2626.4
  Top Layer w6: J1A.42@765.9,1274.21 1404.88,1274.21 1436.53,1242.56 2418.69,1242.56 2516.76,1340.63 3225,1340.63 3300,1265.63 R21_C60_A.1@3300,1258.13
FREQA61: J2A.60 R51_C61_A.1 | length 1929.6
  Top Layer w6: J2A.60@1451.89,412.01 1665.77,412.01 1758.67,504.91 2586.98,504.91 2621.39,504.91 2632.1,515.63 3225,515.63 3300,440.63 R51_C61_A.1@3300,433.13
FREQA62: J1A.54 R27_C62_A.1 | length 2600.3
  Top Layer w6: J1A.54@765.9,1132.48 1334.12,1132.48 1345.93,1120.67 1829.53,1120.67 2258.55,1120.67 2525.98,1120.67 2580.94,1175.63 3225,1175.63 3300,1100.63 R27_C62_A.1@3300,1093.13
FREQA63: J1A.30 R15_C63_A.1 | length 2651.6
  Top Layer w6: J1A.30@765.9,1415.95 1453.56,1415.95 1504.01,1365.5 2361.9,1365.5 2502.02,1505.63 3225,1505.63 3300,1430.63 R15_C63_A.1@3300,1423.13
FREQA64: J1A.4 R2_C64_A.1 | length 2906
  Top Layer w6: J1A.4@765.9,1723.03 1582.35,1723.03 1673.51,1631.87 2143.77,1631.87 2366.28,1854.38 3398.75,1854.38 R2_C64_A.1@3500,1753.13
FREQA65: J2A.84 R63_C65_A.1 | length 1971.1
  Top Layer w6: J2A.84@1451.89,128.54 1784.72,128.54 1915.21,259.03 2161.82,259.03 2235.23,185.63 3225,185.63 3300,110.63 R63_C65_A.1@3300,103.13
FREQA66: J2A.48 R45_C66_A.1 | length 1939.2
  Top Layer w6: J2A.48@1451.89,553.74 1621.61,553.74 1695.72,627.85 2536,627.85 2588.77,680.63 3225,680.63 3300,605.63 R45_C66_A.1@3300,598.13
FREQA67: J1A.66 J2A.11 J2A.12 R33_C67_A.1 | length 2590.7
  Top Layer w6: J1A.66@765.9,990.75 J2A.11@1229.45,990.75 1268.3,990.75 1280.11,978.94 J2A.12@1451.89,978.94 2373.37,978.94 2405.06,1010.63 3225,1010.63 3300,935.63 R33_C67_A.1@3300,928.13
FREQB0: J1B.46 R23_C0_B.1 | length 1547.6
  Bottom Layer w6: J1B.46@1674.33,589.17 1751.99,589.17 ; R23_C0_B.1@2900,598.13 2855,553.13 2645,553.13 2364.55,553.13 2279.9,637.77 1980,637.77 ; 1751.99,589.17 1766.48,603.66 ; 1751.99,589.17 1766.48,603.66 ; 1766.48,603.66 1767.09,603.66 ; 1766.48,603.66 1767.09,603.66 ; 1767.09,603.66 1801.19,637.77 ; 1767.09,603.66 1801.19,637.77 ; 1801.19,637.77 1980,637.77 ; 1801.19,637.77 1980,637.77
FREQB1: J1B.56 R28_C1_B.1 | length 1790.9
  Bottom Layer w6: J1B.56@1674.33,707.28 1729.29,707.28 ; 2611,699.38 3036.25,699.38 R28_C1_B.1@3100,763.13 ; 2615,699.38 2382.16,699.38 2309.24,772.3 1980,772.3 ; 1729.29,707.28 1794.31,772.3 ; 1729.29,707.28 1794.31,772.3 ; 1794.31,772.3 1980,772.3 ; 1794.31,772.3 1980,772.3
FREQB2: J2B.68 R55_C2_B.1 | length 2806.9
  Bottom Layer w6: J2B.68@988.34,1498.62 1359.73,1498.62 1428.79,1429.56 1980,1429.56 2567.44,1429.56 2606,1468.13 ; 2605,1468.13 3580,1468.13 R55_C2_B.1@3700,1588.13
FREQB3: J2B.40 R41_C3_B.1 | length 2124.5
  Bottom Layer w6: J2B.40@988.34,1167.91 1294.46,1167.91 1313.74,1148.64 1517.14,1148.64 1517.36,1148.86 1690.9,1148.86 1691.12,1148.64 1845,1148.64 ; R41_C3_B.1@2900,1093.13 2855,1048.13 2645,1048.13 2474.06,1048.13 2396.22,1125.96 1980,1125.96 ; 1845,1148.64 1867.68,1125.96 ; 1845,1148.64 1867.68,1125.96 ; 1867.68,1125.96 1980,1125.96 ; 1867.68,1125.96 1980,1125.96
FREQB4: J1B.81 J1B.82 J2B.28 R35_C4_B.1 | length 2265.2
  Bottom Layer w6: J2B.28@988.34,1026.18 1255.79,1026.18 1279.41,1002.56 J1B.81@1451.89,1002.56 1541.25,1002.56 1553.06,1014.37 J1B.82@1674.33,1014.37 1733.91,1014.37 ; R35_C4_B.1@2900,928.13 2855,883.13 2645,883.13 2437.56,883.13 2354.09,966.59 1980,966.59 ; 1733.91,1014.37 1781.69,966.59 ; 1733.91,1014.37 1781.69,966.59 ; 1781.69,966.59 1980,966.59 ; 1781.69,966.59 1980,966.59
FREQB5: J1B.20 R10_C5_B.1 | length 2195.2
  Bottom Layer w6: J1B.20@1674.33,282.09 1813.21,282.09 ; 1980,377.77 1908.89,377.77 ; 2611,204.38 3036.25,204.38 ; R10_C5_B.1@3100,268.13 3036.25,204.38 ; 1813.21,282.09 1908.89,377.77 ; 1813.21,282.09 1908.89,377.77 ; 1908.89,377.77 2172.74,377.77 2346.13,204.38 3036.25,204.38
FREQB6: J2B.62 R52_C6_B.1 | length 2166.4
  Bottom Layer w6: J2B.62@988.34,1427.76 1345.75,1427.76 1403.94,1369.56 1980,1369.56 2560.13,1369.56 2570.32,1359.38 3036.25,1359.38 R52_C6_B.1@3100,1423.13
FREQB7: J1B.8 R4_C7_B.1 | length 1782.6
  Bottom Layer w6: J1B.8@1674.33,140.36 1841.18,140.36 ; 2611,39.38 3036.25,39.38 R4_C7_B.1@3100,103.13 ; 2615,39.38 2343.95,39.38 2125.56,257.77 1980,257.77 ; 1841.18,140.36 1958.59,257.77 ; 1841.18,140.36 1958.59,257.77 ; 1958.59,257.77 1980,257.77 ; 1958.59,257.77 1980,257.77
FREQB8: J2B.88 R65_C8_B.1 | length 2006.4
  Bottom Layer w6: J2B.88@988.34,1734.84 1406.35,1734.84 1511.64,1629.56 1980,1629.56 2373.76,1629.56 2452.33,1708.13 2645,1708.13 2855,1708.13 R65_C8_B.1@2900,1753.13
FREQB9: J2B.76 R59_C9_B.1 | length 1978.8
  Bottom Layer w6: J2B.76@988.34,1593.11 1378.38,1593.11 1461.93,1509.56 1980,1509.56 2490.35,1509.56 2523.91,1543.13 2645,1543.13 2855,1543.13 R59_C9_B.1@2900,1588.13
FREQB10: J1B.14 R7_C10_B.1 | length 2387.7
  Bottom Layer w6: J1B.14@1674.33,211.22 1827.19,211.22 ; 2605,148.13 3580,148.13 R7_C10_B.1@3700,268.13 ; 2606,148.13 2323.36,148.13 2153.72,317.77 1980,317.77 ; 1827.19,211.22 1933.74,317.77 ; 1827.19,211.22 1933.74,317.77 ; 1933.74,317.77 1980,317.77 ; 1933.74,317.77 1980,317.77
FREQB11: J1B.62 R31_C11_B.1 | length 2424.9
  Bottom Layer w6: J1B.62@1674.33,778.15 1715.3,778.15 ; 2605,808.13 3580,808.13 R31_C11_B.1@3700,928.13 ; 2606,808.13 2380.32,808.13 2332.88,855.57 1980,855.57 ; 1715.3,778.15 1792.72,855.57 ; 1715.3,778.15 1792.72,855.57 ; 1792.72,855.57 1980,855.57 ; 1792.72,855.57 1980,855.57
FREQB12: J2B.80 R61_C12_B.1 | length 2834.6
  Bottom Layer w6: J2B.80@988.34,1640.36 1387.71,1640.36 1478.5,1549.56 1980,1549.56 2447.59,1549.56 2531.15,1633.13 2606,1633.13 ; 2605,1633.13 3580,1633.13 R61_C12_B.1@3700,1753.13
FREQB13: J2B.56 R49_C13_B.1 | length 2794
  Bottom Layer w6: J2B.56@988.34,1356.89 1331.76,1356.89 1379.09,1309.56 1980,1309.56 2496.89,1309.56 2514.61,1291.84 2594.71,1291.84 2606,1303.13 ; 2605,1303.13 3580,1303.13 R49_C13_B.1@3700,1423.13
FREQB14: J1B.50 R25_C14_B.1 | length 2376.3
  Bottom Layer w6: J1B.50@1674.33,636.42 1742.67,636.42 ; 2605,643.13 3580,643.13 R25_C14_B.1@3700,763.13 ; 2606,643.13 2339.32,643.13 2293.41,689.03 1980,689.03 ; 1742.67,636.42 1749.91,643.66 ; 1742.67,636.42 1749.91,643.66 ; 1749.91,643.66 1750.52,643.66 ; 1749.91,643.66 1750.52,643.66 ; 1750.52,643.66 1795.89,689.03 ; 1750.52,643.66 1795.89,689.03 ; 1795.89,689.03 1980,689.03 ; 1795.89,689.03 1980,689.03
FREQB15: J1B.38 R19_C15_B.1 | length 2371
  Bottom Layer w6: J1B.38@1674.33,494.69 1770.64,494.69 ; 2605,478.13 3580,478.13 R19_C15_B.1@3700,598.13 ; 2606,478.13 2307.31,478.13 2227.67,557.77 1980,557.77 ; 1770.64,494.69 1799.62,523.66 ; 1770.64,494.69 1799.62,523.66 ; 1799.62,523.66 1800.23,523.66 ; 1799.62,523.66 1800.23,523.66 ; 1800.23,523.66 1834.33,557.77 ; 1800.23,523.66 1834.33,557.77 ; 1834.33,557.77 1980,557.77 ; 1834.33,557.77 1980,557.77
FREQB16: J2B.52 R47_C16_B.1 | length 1970.3
  Bottom Layer w6: J2B.52@988.34,1309.65 1322.44,1309.65 1362.52,1269.56 1980,1269.56 2457.73,1269.56 2514.16,1213.13 2645,1213.13 2855,1213.13 R47_C16_B.1@2900,1258.13
FREQB17: J1B.26 R13_C17_B.1 | length 2379
  Bottom Layer w6: J1B.26@1674.33,352.95 1799.22,352.95 ; 2605,313.13 3580,313.13 R13_C17_B.1@3700,433.13 ; 2606,313.13 2318.48,313.13 2193.84,437.77 1980,437.77 ; 1799.22,352.95 1884.04,437.77 ; 1799.22,352.95 1884.04,437.77 ; 1884.04,437.77 1980,437.77 ; 1884.04,437.77 1980,437.77
FREQB18: J2B.44 R43_C18_B.1 | length 3513.1
  Bottom Layer w6: J2B.44@988.34,1215.16 1303.79,1215.16 1330.31,1188.64 1500.57,1188.64 1500.79,1188.86 1707.47,1188.86 ; 1980,1188.86 1806.24,1188.78 ; 2605,1138.13 3580,1138.13 R43_C18_B.1@3700,1258.13 ; 2606,1138.13 2450.63,1138.13 2400.11,1188.64 1980,1188.64 ; 1707.47,1188.86 1806.24,1188.78 ; 1707.47,1188.86 1707.69,1188.64 ; 1707.69,1188.64 1980,1188.64 ; 1707.69,1188.64 1980,1188.64 ; 1806.24,1188.78 1980,1188.64
FREQB19: J1B.85 J1B.86 J2B.32 R37_C19_B.1 | length 3053.5
  Bottom Layer w6: J2B.32@988.34,1073.43 1266.63,1073.43 1290.25,1049.8 J1B.85@1451.89,1049.8 1531.92,1049.8 1543.73,1061.62 J1B.86@1674.33,1061.62 1756.56,1061.62 ; 2605,973.13 3580,973.13 R37_C19_B.1@3700,1093.13 ; 2606,973.13 2417.72,973.13 2368.74,1022.1 1980,1022.1 ; 1756.56,1061.62 1796.07,1022.1 ; 1756.56,1061.62 1796.07,1022.1 ; 1796.07,1022.1 1980,1022.1 ; 1796.07,1022.1 1980,1022.1
FREQB20: J1B.2@1674.33,69.49 R1_C20_B.1 | length 3543.5
  Bottom Layer w6: J1B.2@1674.33,69.49 1855.17,69.49 ; 2605,-16.87 3580,-16.87 ; 1855.17,69.49 1983.45,197.77 ; 1855.17,69.49 1983.45,197.77 ; 1983.45,197.77 2099.2,197.77 2313.84,-16.87 2606,-16.87 3580,-16.87 ; 3580,-16.87 R1_C20_B.1@3700,103.13 3580,-16.87
FREQB21: J1B.34 R17_C21_B.1 | length 1555.7
  Bottom Layer w6: J1B.34@1674.33,447.44 1780.57,447.44 ; R17_C21_B.1@2900,433.13 2855,388.13 2645,388.13 2346.03,388.13 2216.39,517.77 1980,517.77 ; 1780.57,447.44 1850.9,517.77 ; 1780.57,447.44 1850.9,517.77 ; 1850.9,517.77 1980,517.77 ; 1850.9,517.77 1980,517.77
FREQB22: J2B.86 R64_C22_B.1 | length 2217.2
  Bottom Layer w6: J2B.86@988.34,1711.22 1401.69,1711.22 1503.35,1609.56 1980,1609.56 2395.14,1609.56 2474.96,1689.38 2615,1689.38 ; 2611,1689.38 3036.25,1689.38 R64_C22_B.1@3100,1753.13
FREQB23: J2B.38 R40_C23_B.1 | length 2359.9
  Bottom Layer w6: J2B.38@988.34,1144.29 1289.8,1144.29 1305.45,1128.64 1525.42,1128.64 1525.65,1128.86 1682.61,1128.86 1682.83,1128.64 1819.55,1128.64 ; 2611,1029.38 3036.25,1029.38 R40_C23_B.1@3100,1093.13 ; 2615,1029.38 2461.32,1029.38 2385.33,1105.37 1980,1105.37 ; 1819.55,1128.64 1842.82,1105.37 ; 1819.55,1128.64 1842.82,1105.37 ; 1842.82,1105.37 1980,1105.37 ; 1842.82,1105.37 1980,1105.37
FREQB24: J2B.74 R58_C24_B.1 | length 2189.6
  Bottom Layer w6: J2B.74@988.34,1569.49 1373.72,1569.49 1453.65,1489.56 1980,1489.56 2505.43,1489.56 2540.25,1524.38 2615,1524.38 ; 2611,1524.38 3036.25,1524.38 R58_C24_B.1@3100,1588.13
FREQB25: J2B.64 R53_C25_B.1 | length 1960.6
  Bottom Layer w6: J2B.64@988.34,1451.38 1350.41,1451.38 1412.22,1389.56 1980,1389.56 2568.02,1389.56 2579.45,1378.13 2645,1378.13 2855,1378.13 R53_C25_B.1@2900,1423.13
FREQB26: J1B.58 R29_C26_B.1 | length 1600.9
  Bottom Layer w6: J1B.58@1674.33,730.91 1724.63,730.91 ; 2654.94,718.13 2645,718.13 ; R29_C26_B.1@2900,763.13 2855,718.13 2645,718.13 ; 1724.63,730.91 1793.78,800.06 ; 1724.63,730.91 1793.78,800.06 ; 1793.78,800.06 1980,800.06 ; 1793.78,800.06 1980,800.06 ; 1980,800.06 2320.02,800.06 2401.95,718.13 2645,718.13
FREQB27: J1B.10 R5_C27_B.1 | length 1573
  Bottom Layer w6: J1B.10@1674.33,163.98 1836.52,163.98 ; R5_C27_B.1@2900,103.13 2855,58.13 2645,58.13 2355.79,58.13 2136.14,277.77 1980,277.77 ; 1836.52,163.98 1950.31,277.77 ; 1836.52,163.98 1950.31,277.77 ; 1950.31,277.77 1980,277.77 ; 1950.31,277.77 1980,277.77
FREQB28: J1B.79 J1B.80 J2B.26 R34_C28_B.1 | length 2482.8
  Bottom Layer w6: J2B.26@988.34,1002.56 1247.6,1002.56 1271.22,978.94 J1B.79@1451.89,978.94 1547.89,978.94 1559.71,990.75 J1B.80@1674.33,990.75 1727.84,990.75 ; 2611,864.38 3036.25,864.38 R34_C28_B.1@3100,928.13 ; 2615,864.38 2421.22,864.38 2346.76,938.84 1980,938.84 ; 1727.84,990.75 1779.75,938.84 ; 1727.84,990.75 1779.75,938.84 ; 1779.75,938.84 1980,938.84 ; 1779.75,938.84 1980,938.84
FREQB29: J1B.44 R22_C29_B.1 | length 1757.2
  Bottom Layer w6: J1B.44@1674.33,565.55 1756.65,565.55 ; 2611,534.38 3036.25,534.38 R22_C29_B.1@3100,598.13 ; 2615,534.38 2351.81,534.38 2268.42,617.77 1980,617.77 ; 1756.65,565.55 1774.77,583.66 ; 1756.65,565.55 1774.77,583.66 ; 1774.77,583.66 1775.37,583.66 ; 1774.77,583.66 1775.37,583.66 ; 1775.37,583.66 1809.48,617.77 ; 1775.37,583.66 1809.48,617.77 ; 1809.48,617.77 1980,617.77 ; 1809.48,617.77 1980,617.77
FREQB30: J1B.22 R11_C30_B.1 | length 1564.4
  Bottom Layer w6: J1B.22@1674.33,305.71 1808.55,305.71 ; R11_C30_B.1@2900,268.13 2855,223.13 2645,223.13 2350.01,223.13 2175.37,397.77 1980,397.77 ; 1808.55,305.71 1900.6,397.77 ; 1808.55,305.71 1900.6,397.77 ; 1900.6,397.77 1980,397.77 ; 1900.6,397.77 1980,397.77
FREQB31: J2B.50 R46_C31_B.1 | length 2180
  Bottom Layer w6: J2B.50@988.34,1286.03 1317.77,1286.03 1354.24,1249.56 1980,1249.56 2439.04,1249.56 2494.23,1194.38 2615,1194.38 ; 2611,1194.38 3036.25,1194.38 R46_C31_B.1@3100,1258.13
FREQB32: J1B.32 R16_C32_B.1 | length 1765.3
  Bottom Layer w6: J1B.32@1674.33,423.82 1785.24,423.82 ; 2611,369.38 3036.25,369.38 R16_C32_B.1@3100,433.13 ; 2615,369.38 2338.7,369.38 2210.3,497.77 1980,497.77 ; 1785.24,423.82 1859.18,497.77 ; 1785.24,423.82 1859.18,497.77 ; 1859.18,497.77 1980,497.77 ; 1859.18,497.77 1980,497.77